# Altium PCB PCB_MAX7219_SHIELD.PcbDoc
Units mil, origin at the board's own origin, x right, y up, seen from the top; angles counter-clockwise.
Board outline 2755.91 x 2244.09 mil, 2 copper layers (Top Layer, Bottom Layer); 8 components, 25 nets, 164 pads, 9 vias.
Unrouted connection lines stored in the file: 17.
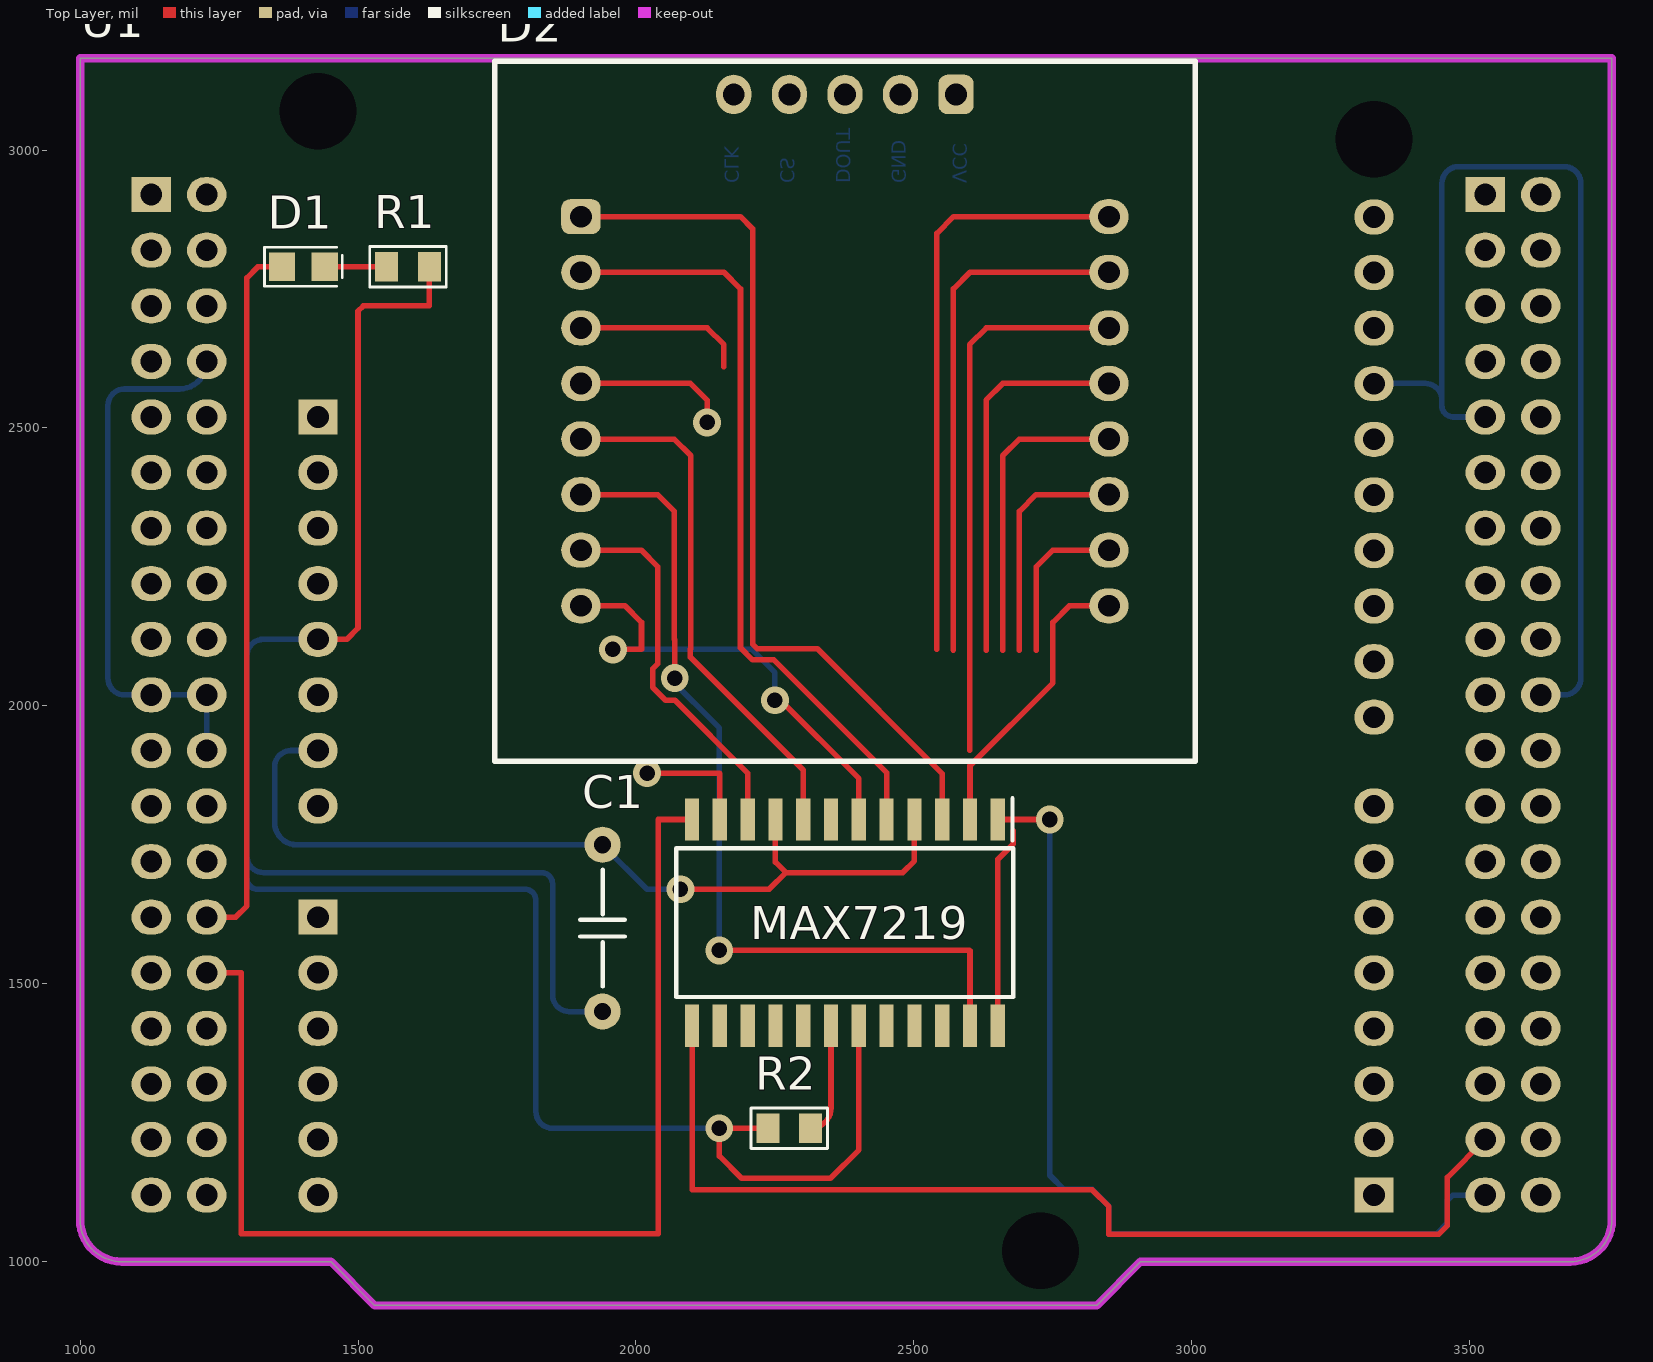
[diagram p0: Top Layer view]
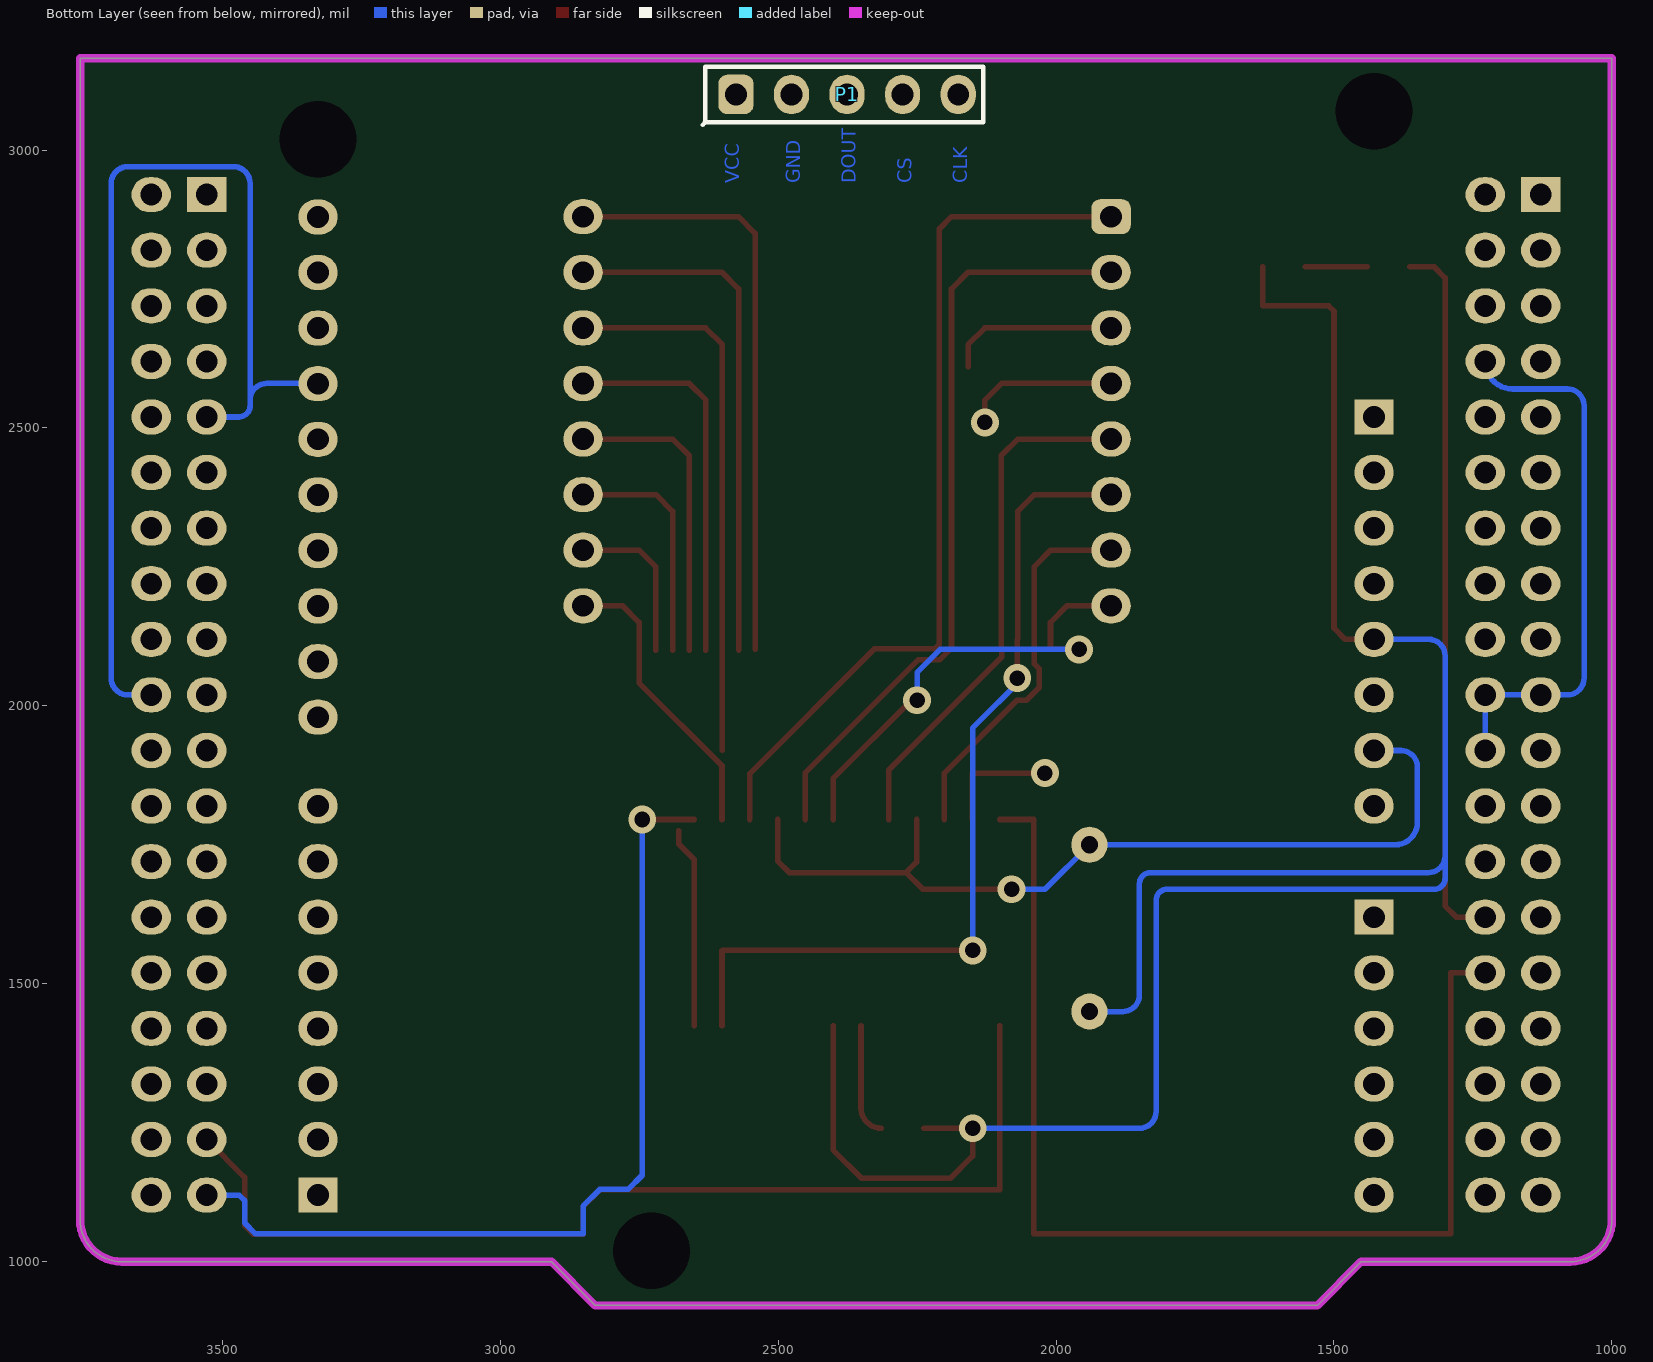
[diagram p1: Bottom Layer view, seen from below]
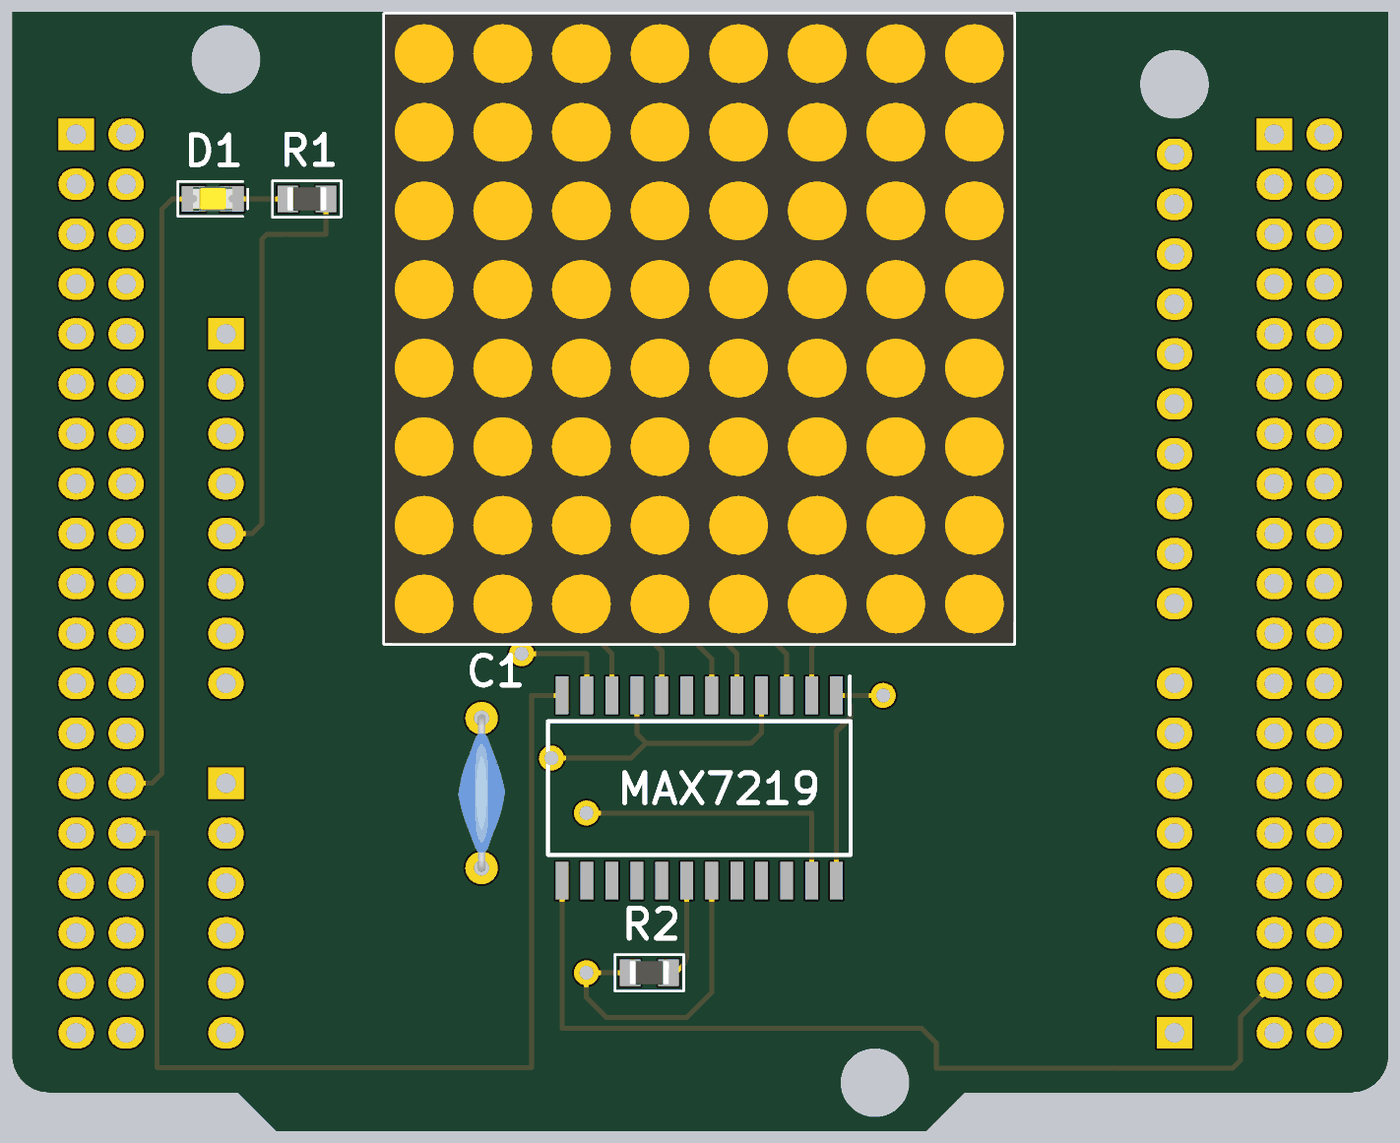
[diagram p2: 3D render of the assembled board from above, using the file's embedded part models]

## Layer stack, top to bottom
Top Solder: solder mask 0.4, Solder Resist, Dk 3.5
Top Layer: signal copper 1.4
Dielectric 1: dielectric 12.6, FR-4, Dk 4.8
Bottom Layer: signal copper 1.4
Bottom Solder: solder mask 0.4, Solder Resist, Dk 3.5

## Board outline
1075,1000 cw(c1075,1075) 1000,1075 1000,3165.35 3755.91,3165.35 3755.91,1075 cw(c3680.91,1075) 3680.91,1000 2907.87,1000 2829.13,921.26 1529.92,921.26 1451.18,1000

## Design rules (kind name [scope] priority, off if disabled: settings)
Clearance [All] p1: gap=10 ignorepadtopadclearanceinfootprint=FALSE except(0: Arc-Hole Track-Hole SMDPad-Hole THPad-Hole Via-Hole Fill-Hole Poly-Hole Region-Hole Text-Hole)
PolygonConnect [All] p1: connectstyle=Relief reliefconductorwidth=10 reliefentries=4 polygonreliefangle="90 Angle" airgapwidth=10
RoomDefinition SCH_MAX7219_SHIELD [InComponentClass('SCH_MAX7219_SHIELD')] p1: confinementstyle=ConfineIn formatcopy=TRUE lockcomponents=FALSE outline 6975,820 11985,820 11985,3705 6975,3705
RoutingVias [All] p1: holewidth=28 width=50 viastyle="Through Hole" minholewidth=28 minwidth=50 maxholewidth=28 maxwidth=50
SolderMaskExpansion [All] p1: expansion=4
Width [All] p1: maxlimit=10 minlimit=10 preferedwidth=10
30 further rules are at their usual default settings.

## Components (designator, comment, footprint, x,y, rotation, side; value= is the part's Value field where it differs from the comment)
C1 "100nf" "CAP Ceramic/W300" 1940,1750 r270 top locked
D1 "Led" "Led 0805" 1401.61,2790 r180 top locked
D2 "1088AS" LED/MATRIX/1088 2376,2530 r270 top locked
MAX7219 "MAX7219CWG+" SOIC127P1032X265-24N 2376,1610 r270 top locked (schematic designator B1)
P1 "Header 5" HDR/Header/5 2376,3100 r180 bottom locked
R1 "9.53k" "R 0805" 1590,2790 r180 top
R2 "9.53k" "R 0805" 2276,1240 r180 top locked
U1 "NUCLEO-F103RB" NUCLEO 1000,1000 r0 top locked

## Footprints (in the part's own frame and the unit in brackets; to place one, negate y for a bottom-side part, rotate by r counter-clockwise, add the part's x,y. Pads: shape width x height; smd on the part's side, far side on the other; paste and mask are expansions set on the pad)
"CAP Ceramic/W300" [mil]
  round 65 hole 31: 1(0,0) 2(300,0)
  silkscreen extent 45,-40 255,40, body extent -8,-47 307,47, height 340
HDR/Header/5 [mm]
  rrect50% 1.6x1.8 hole 1: 1(-5.08,0)
  oval 1.6x1.8 hole 1: 2(-2.54,0) 3(0,0) 4(2.54,0) 5(5.08,0)
  silkscreen extent -6.6,-1.4 6.22,1.27, body extent -6.35,-1.27 6.35,1.27, height 8.89
"Led 0805" [mm] "Led SMD 0805"
  rect 1.2x1.3 smd: 1(-0.975,0) 2(0.975,0)
  silkscreen extent -1.78,-0.89 1.78,0.89, body extent -1.01,-0.64 1.01,0.61, height 1.1
LED/MATRIX/1088 [mm]
  rrect50% 1.6x1.8 hole 1: 1(-8.89,-12.065)
  oval 1.6x1.8 hole 1: 2(-6.35,-12.065) 3(-3.81,-12.065) 4(-1.27,-12.065) 5(1.27,-12.065) 6(3.81,-12.065) 7(6.35,-12.065) 8(8.89,-12.065) 9(8.89,12.065) 10(6.35,12.065) 11(3.81,12.065) 12(1.27,12.065) 13(-1.27,12.065) 14(-3.81,12.065) 15(-6.35,12.065) 16(-8.89,12.065)
  silkscreen extent -16,-16 16,16, body extent -16,-16 16,16, height 8
NUCLEO [mm]
  oval 1.8x1.6 hole 1: A5_1(59.13,24.88) A5_2(59.13,27.42) A5_3(59.13,29.96) A5_4(59.13,32.5) A5_5(59.13,35.04) A5_6(59.13,37.58) A5_7(59.13,40.12) A5_8(59.13,42.66) A5_9(59.13,45.2) A5_10(59.13,47.74) A6_2(10.87,36.06) A6_3(10.87,33.52) A6_4(10.87,30.98) A6_5(10.87,28.44) A6_6(10.87,25.9) A6_7(10.87,23.36) A6_8(10.87,20.82) A8_2(10.87,13.2) A8_3(10.87,10.66) A8_4(10.87,8.12) A8_5(10.87,5.58) A8_6(10.87,3.04) A9_2(59.13,5.58) A9_3(59.13,8.12) A9_4(59.13,10.66) A9_5(59.13,13.2) A9_6(59.13,15.74) A9_7(59.13,18.28) A9_8(59.13,20.82) M7_2(5.79,48.76) M7_3(3.25,46.22) M7_4(5.79,46.22) M7_5(3.25,43.68) M7_6(5.79,43.68) M7_7(3.25,41.14) M7_8(5.79,41.14) M7_9(3.25,38.6) M7_10(5.79,38.6) M7_11(3.25,36.06) M7_12(5.79,36.06) M7_13(3.25,33.52) M7_14(5.79,33.52) M7_15(3.25,30.98) M7_16(5.79,30.98) M7_17(3.25,28.44) M7_18(5.79,28.44) M7_19(3.25,25.9) M7_20(5.79,25.9) M7_21(3.25,23.36) M7_22(5.79,23.36) M7_23(3.25,20.82) M7_24(5.79,20.82) M7_25(3.25,18.28) M7_26(5.79,18.28) M7_27(3.25,15.74) M7_28(5.79,15.74) M7_29(3.25,13.2) M7_30(5.79,13.2) M7_31(3.25,10.66) M7_32(5.79,10.66) M7_33(3.25,8.12) M7_34(5.79,8.12) M7_35(3.25,5.58) M7_36(5.79,5.58) M7_37(3.25,3.04) M7_38(5.79,3.04) M10_2(66.75,48.76) M10_3(64.21,46.22) M10_4(66.75,46.22) M10_5(64.21,43.68) M10_6(66.75,43.68) M10_7(64.21,41.14) M10_8(66.75,41.14) M10_9(64.21,38.6) M10_10(66.75,38.6) M10_11(64.21,36.06) M10_12(66.75,36.06) M10_13(64.21,33.52) M10_14(66.75,33.52) M10_15(64.21,30.98) M10_16(66.75,30.98) M10_17(64.21,28.44) M10_18(66.75,28.44) M10_19(64.21,25.9) M10_20(66.75,25.9) M10_21(64.21,23.36) M10_22(66.75,23.36) M10_23(64.21,20.82) M10_24(66.75,20.82) M10_25(64.21,18.28) M10_26(66.75,18.28) M10_27(64.21,15.74) M10_28(66.75,15.74) M10_29(64.21,13.2) M10_30(66.75,13.2) M10_31(64.21,10.66) M10_32(66.75,10.66) M10_33(64.21,8.12) M10_34(66.75,8.12) M10_35(64.21,5.58) M10_36(66.75,5.58) M10_37(64.21,3.04) M10_38(66.75,3.04)
  rect 1.8x1.6 hole 1: A6_1(10.87,38.6) A8_1(10.87,15.74) A9_1(59.13,3.04) M7_1(3.25,48.76) M10_1(64.21,48.76)
  round 0 hole 3.5 unplated: HOLD(10.87,52.57) HOLD(43.89,0.5) HOLD(59.13,51.3)
  Keep-Out Layer lines w0.381: 0,1.905 ccw(c1.905,1.905) 1.905,0 11.46,0 13.46,-2 46.46,-2 48.46,0 68.095,0 ccw(c68.095,1.905) 70,1.905 70,55 0,55 0,1.905
"R 0805" [mm] "Chip Resistor, 2-Leads, Body 2.0x1.3mm, IPC Medium Density"
  rect 1.05x1.35 smd: 1(-0.975,0) 2(0.975,0)
  silkscreen extent -1.75,-0.92 1.75,0.92, body extent -1,-0.61 1,0.59, height 0.5
SOIC127P1032X265-24N [mm]
  rect 1.925x0.65 smd: 1(-4.712,6.985) 2(-4.712,5.715) 3(-4.712,4.445) 4(-4.712,3.175) 5(-4.712,1.905) 6(-4.712,0.635) 7(-4.712,-0.635) 8(-4.712,-1.905) 9(-4.712,-3.175) 10(-4.712,-4.445) 11(-4.712,-5.715) 12(-4.712,-6.985) 13(4.712,-6.985) 14(4.712,-5.715) 15(4.712,-4.445) 16(4.712,-3.175) 17(4.712,-1.905) 18(4.712,-0.635) 19(4.712,0.635) 20(4.712,1.905) 21(4.712,3.175) 22(4.712,4.445) 23(4.712,5.715) 24(4.712,6.985)
  silkscreen extent -5.68,-7.7 3.4,7.7

## Part data
C1: library part "Capacitor NP", "Capacitor non-pol"
D1: "Typical LED"
D2: library part "LED MATRIX 1088AS", "1088AS, Common-Cathode, LED Matrix 8x8, RED, 32x32mm"
MAX7219: "MAX7219CWG+, LED Driver, 8-Digits 64-Segments, 5V, 24-Pin SOIC W", Manufacturer_Name="Maxim Integrated", Mouser Part Number=700-MAX7219CWG, Arrow Part Number=MAX7219CWG+, Arrow Price/Stock=https://www.arrow.com/en/products/max7219cwg/maxim-integrated?region=nac, Datasheet Link=http://datasheets.maximintegrated.com/en/ds/MAX7219-MAX7221.pdf, Geometry.Height=2.65mm, Manufacturer_Part_Number=MAX7219CWG+, Mouser Price/Stock=https://www.mouser.co.uk/ProductDetail/Maxim-Integrated/MAX7219CWG%2b?qs=1THa7WoU59FAb2MozDF%2Fgw%3D%3D
P1: "Header, 5-Pin"
R1 R2: library part Resistor, "Resistor"
U1: "STM32F103RB, mbed-Enabled Development Nucleo-64 STM32F1 ARM® Cortex®-M3 MCU 32-Bit Embedded Evaluation Board", Manufacturer=STMicroelectronics, BRAND=STMicroelectronics, Manufacturer Product Number=NUCLEO-F103RB, PART NO=NUCLEO-F103RB, STOCK CODE=497-14362-ND, SUPPLIER=digi-key, TYPE="EVAL BRD"

## Via types
v1: diameter 50, hole 28, Top Layer to Bottom Layer, 9 vias

## Nets (pads, with @x,y where several pads share a name; then routed paths per layer and width w, separated by ;. In a path a pad name is that pad's centre, name@x,y a point inside that pad or via, vN(x,y) a via of type N, cw(c..) or ccw(c..) an arc to the next point about the centre after c; other vN are vias at no path point)
+5V: C1.2 MAX7219.19 P1.1 R1.1 R2.2 U1.A6_5 | length 4203.5
  Top Layer w10: U1.A6_5 1479.68,2119.68 1500,2140 1500,2710 1509.68,2719.68 1628.39,2719.68 R1.1 ; R2.2 v1(2150,1240) 2150,1190 2190,1150 2350,1150 2401,1201 MAX7219.19
  Bottom Layer w10: U1.A6_5 1329.68,2119.68 ccw(c1329.68,2090) 1300,2090 1300,1730 ; C1.2 1880,1450 cw(c1880,1480) 1850,1480 1850,1680 ccw(c1830,1680) 1830,1700 1330,1700 cw(c1330,1730) 1300,1730 ; v1(2150,1240) 1850,1240 cw(c1850,1270) 1820,1270 1820,1650 ccw(c1800,1650) 1800,1670 1320,1670 cw(c1320,1690) 1300,1690 1300,1730
COL0: D2.13 MAX7219.22 | length 683.4
  Top Layer w10: 2630,2100 2630,2550 2660,2580 D2.13
COL1: D2.3 MAX7219.14 | length 309.5
  Top Layer w10: D2.3 2128.11,2680 2158.11,2650 2158.11,2610
COL2: D2.4 MAX7219.16 | length 317.8
  Top Layer w10: D2.4@1921,2560 D2.4 2098.11,2580 2128.11,2550 v1(2128.11,2510) v1@2128.11,2500
COL3: D2.10 MAX7219.20 | length 293.4
  Top Layer w10: 2720,2100 2720,2250 2750,2280 D2.10
COL4: D2.6 MAX7219.23 | length 1604.1
  Top Layer w10: D2.6 2039.06,2380 2069.06,2350 2069.06,2120 2070,2119.06 v1(2070,2050) ; v1(2150,1560) 2600,1560 2601,1559 MAX7219.23
  Bottom Layer w10: v1(2070,2050) 2060,2050 2150,1960 v1(2150,1560)
COL5: D2.11 MAX7219.21 | length 423.4
  Top Layer w10: 2690,2100 2690,2350 2720,2380 D2.11
COL6: D2.15 MAX7219.15 | length 942
  Top Layer w10: 2571,2100.47 2571,2750 2601,2780 D2.15
COL7: D2.16 MAX7219.17 | length 1070.5
  Top Layer w10: 2541.47,2101.47 2541.47,2850 2571.47,2880 D2.16
DOUT: MAX7219.24 P1.3 | length 362.5
  Top Layer w10: MAX7219.24 2651,1723.61 2678.8,1751.4 2678.8,1775.51
GND: C1.1 MAX7219.4 MAX7219.9 P1.2 U1.A5_7 U1.A6_6 U1.A6_7 U1.M7_8 U1.M7_19 U1.M7_20 U1.M7_22 U1.M10_9 U1.M10_20 | length 4502.1
  Top Layer w10: v1(2080,1670) 2239.68,1670 2269.68,1700 ; MAX7219.9 2251,1718.68 2269.68,1700 ; MAX7219.4 2501,1721 2480,1700 2269.68,1700
  Bottom Layer w10: U1.M7_22 U1.M7_20 U1.M7_19 1080.32,2019.68 cw(c1080.32,2050) 1050,2050 1050,2540 cw(c1080,2540) 1080,2570 1178.27,2570 ccw(c1178.27,2619.68) U1.M7_8 ; U1.A6_7 1380,1919.68 ccw(c1380,1889.68) 1350,1889.68 1350,1790 ccw(c1390,1790) 1390,1750 C1.1 2020,1670 v1(2080,1670) ; U1.A5_7 3327.95,2580 3420,2580 cw(c3420,2550) 3450,2550 ; U1.M10_9 3470.32,2519.68 cw(c3470.32,2540) 3450,2540 3450,2550 ; U1.M10_20 3669.68,2019.68 ccw(c3669.68,2050) 3700,2050 3700,2940 ccw(c3670,2940) 3670,2970 3480,2970 ccw(c3480,2940) 3450,2940 3450,2550
MOSI1: MAX7219.1 U1.M10_37 | length 1642.2
  Top Layer w10: MAX7219.1 v1(2744.49,1795.51)
  Bottom Layer w10: v1(2744.49,1795.51) 2744.49,1155.51 2770,1130 2821,1130 2851,1100 2851,1050 3440,1050 3460,1070 3460,1110 3469.68,1119.68 U1.M10_37
NetB1_18: MAX7219.18 R2.1 | length 205.4
  Top Layer w10: R2.1 ccw(c2314.39,1276.61) 2351,1276.61 MAX7219.18
NetD1_1: D1.1 R1.2 | length 111.6
  Top Layer w10: D1.1 R1.2
ROW0: D2.9 MAX7219.2 | length 529.6
  Top Layer w10: MAX7219.2 2601,1892.24 2750,2041.24 2750,2150 2780,2180 D2.9
ROW1: D2.14 MAX7219.11 | length 1206.9
  Top Layer w10: v1(2020,1879) 2150,1879 2151,1878 MAX7219.11 ; 2600.47,1920 2600.47,2650 2630.47,2680 D2.14
ROW2: D2.8 MAX7219.6 | length 865
  Top Layer w10: D2.8@1899,2180 D2.8 1980,2180 2010,2150 2010,2101.47 v1(1958.53,2101.47) ; v1(2250,2010) 2260,2010 2401,1869 MAX7219.6
  Bottom Layer w10: v1(1958.53,2101.47) 2208.53,2101.47 2250,2060 v1(2250,2010)
ROW3: D2.12 MAX7219.7 | length 553.4
  Top Layer w10: 2660,2100 2660,2450 2690,2480 D2.12
ROW4: D2.1 MAX7219.3 | length 1585.2
  Top Layer w10: D2.1 2188.11,2880 2209.83,2858.28 2209.83,2111.12 2218.11,2102.83 2326.17,2102.83 2551,1878 MAX7219.3
ROW5: D2.7 MAX7219.10 | length 689.9
  Top Layer w10: D2.7 2009.53,2280 2039.53,2250 2039.53,2076.1 2030,2066.57 2030,2033.43 2053.43,2010 2070,2010 2201,1879 MAX7219.10
ROW6: D2.2 MAX7219.5 | length 1385.4
  Top Layer w10: D2.2 2158.11,2780 2188.11,2750 2188.11,2104.55 2209.83,2082.83 2248.17,2082.83 2451,1880 MAX7219.5
ROW7: D2.5 MAX7219.8 | length 948.7
  Top Layer w10: D2.5 2068.58,2480 2098.58,2450 2098.58,2102.36 2098.11,2101.89 2098.11,2087.46 2301,1884.57 MAX7219.8
SCLK1: MAX7219.13 P1.5 U1.M10_35 | length 1906.4
  Top Layer w10: MAX7219.13 2101,1129 2821,1129 2851,1099 2851,1049 3444,1049 3460,1065 3460,1151.73 U1.M10_35
SS1: MAX7219.12 P1.4 U1.M7_30 | length 2088.2
  Top Layer w10: U1.M7_30 1290,1519.68 1290,1050 2040,1050 2040,1795.51 MAX7219.12
TOGGLE_LED: D1.2 U1.M7_28 | length 1282
  Top Layer w10: U1.M7_28 1279.68,1619.68 1300,1640 1300,2770 1320,2790 D1.2
pads on no net: U1.A5_1 U1.A5_2 U1.A5_3 U1.A5_4 U1.A5_5 U1.A5_6 U1.A5_8 U1.A5_9 U1.A5_10 U1.A6_1 U1.A6_2 U1.A6_3 U1.A6_4 U1.A6_8 U1.A8_1 U1.A8_2 U1.A8_3 U1.A8_4 U1.A8_5 U1.A8_6 U1.A9_1 U1.A9_2 U1.A9_3 U1.A9_4 U1.A9_5 U1.A9_6 U1.A9_7 U1.A9_8 U1.HOLD U1.M7_1 U1.M7_2 U1.M7_3 U1.M7_4 U1.M7_5 U1.M7_6 U1.M7_7 U1.M7_9 U1.M7_10 U1.M7_11 U1.M7_12 U1.M7_13 U1.M7_14 U1.M7_15 U1.M7_16 U1.M7_17 U1.M7_18 U1.M7_21 U1.M7_23 U1.M7_24 U1.M7_25 U1.M7_26 U1.M7_27 U1.M7_29 U1.M7_31 U1.M7_32 U1.M7_33 U1.M7_34 U1.M7_35 U1.M7_36 U1.M7_37 U1.M7_38 U1.M10_1 U1.M10_2 U1.M10_3 U1.M10_4 U1.M10_5 U1.M10_6 U1.M10_7 U1.M10_8 U1.M10_10 U1.M10_11 U1.M10_12 U1.M10_13 U1.M10_14 U1.M10_15 U1.M10_16 U1.M10_17 U1.M10_18 U1.M10_19 U1.M10_21 U1.M10_22 U1.M10_23 U1.M10_24 U1.M10_25 U1.M10_26 U1.M10_27 U1.M10_28 U1.M10_29 U1.M10_30 U1.M10_31 U1.M10_32 U1.M10_33 U1.M10_34 U1.M10_36 U1.M10_38

## Other copper
Bottom Layer:
  text "CLK" at 2160,2940 h25 r270
  text "CS" at 2260,2940 h25 r270
  text "DOUT" at 2360,2940 h25 r270
  text "GND" at 2460,2940 h25 r270
  text "VCC" at 2570,2940 h25 r270